# Altium PCB RingEncoder.PcbDoc
Units mil, origin at the board's own origin, x right, y up, seen from the top; angles counter-clockwise.
Board outline 1740 x 1000 mil, 2 copper layers (Top Layer, Bottom Layer); 19 components, 22 nets, 92 pads, 13 vias.
Unrouted connection lines stored in the file: 8.
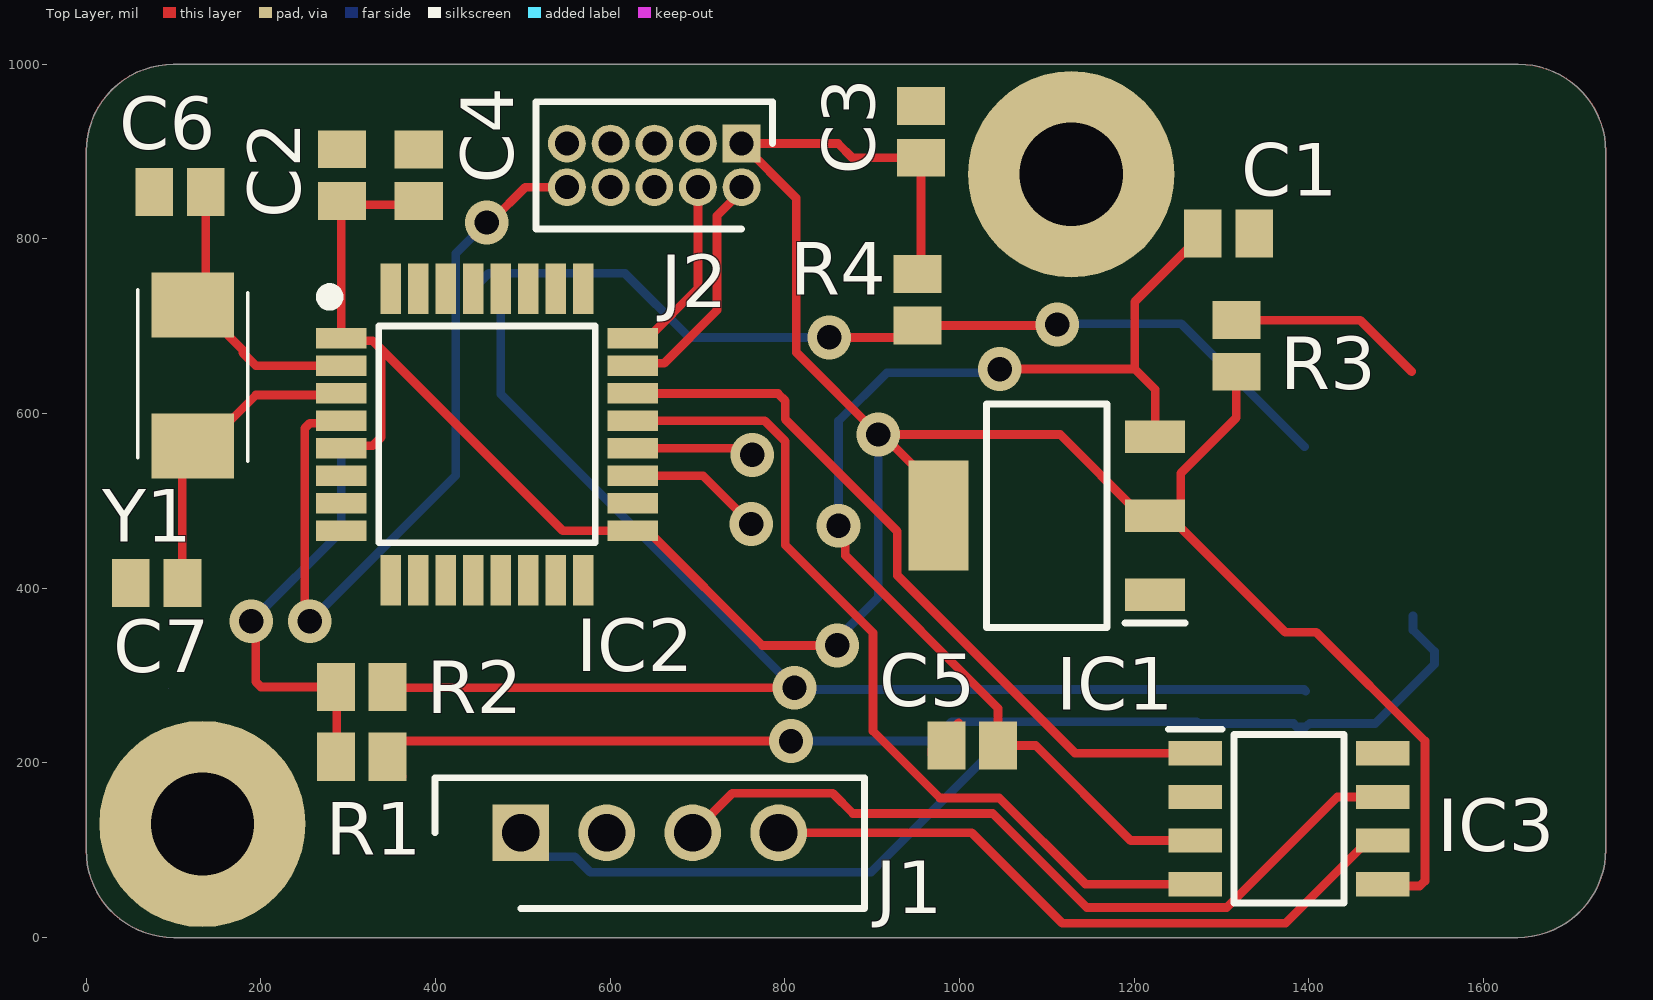
[diagram p0: Top Layer view]
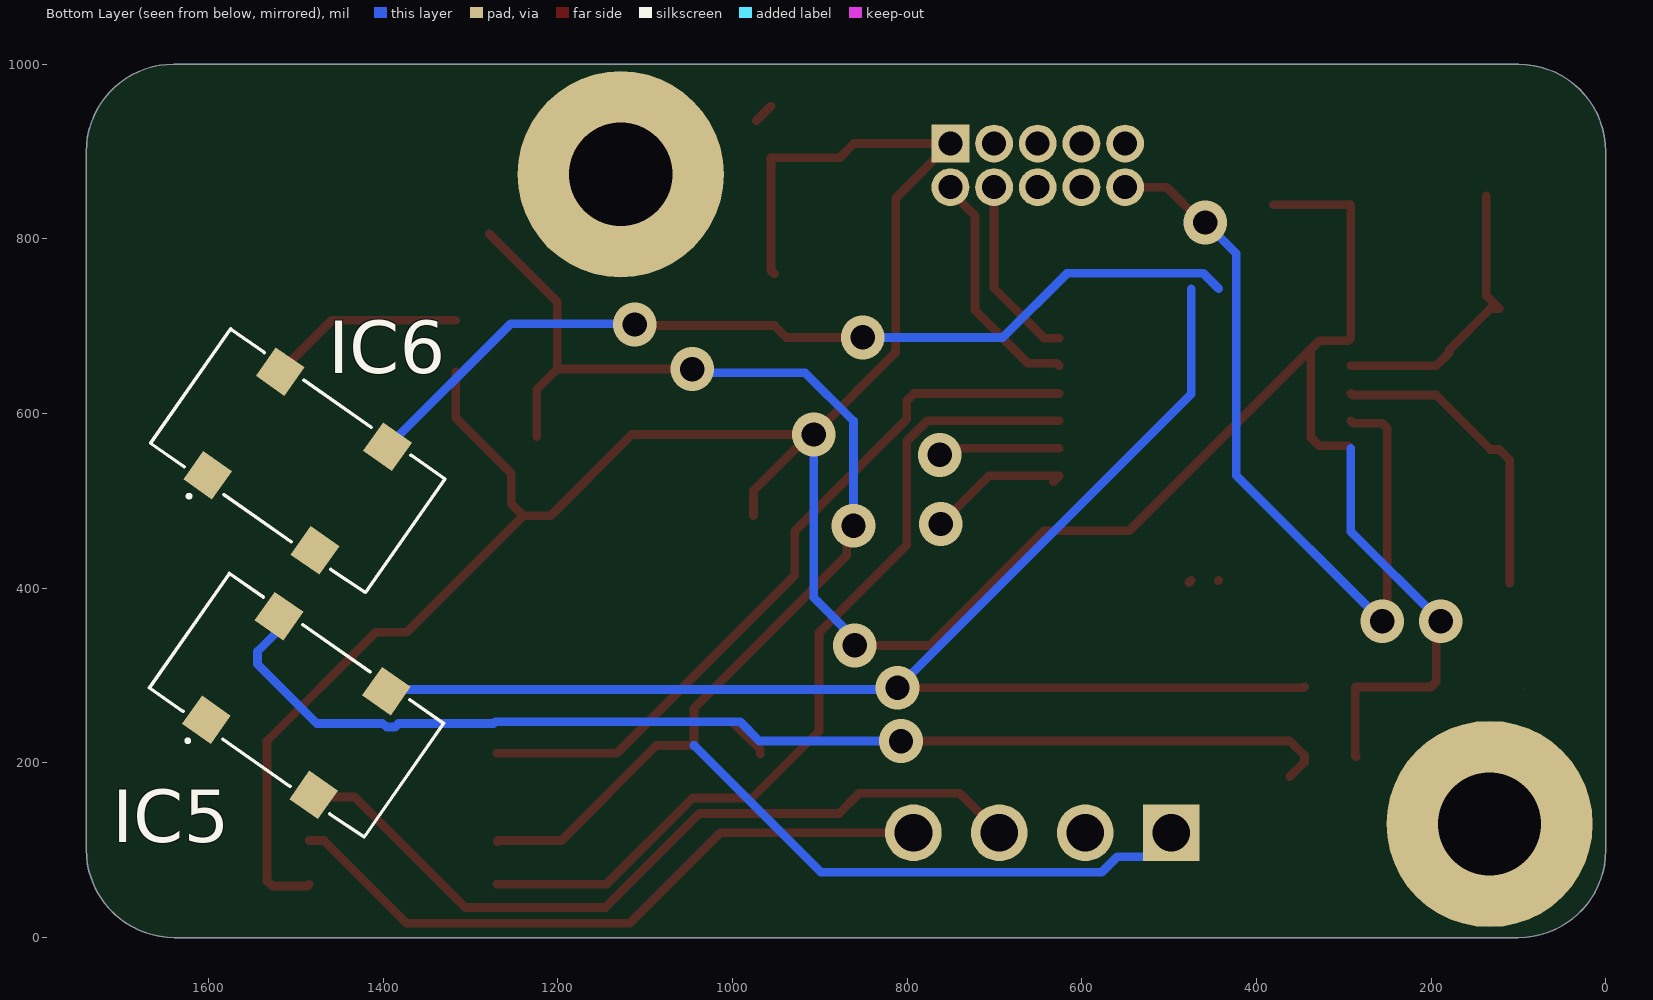
[diagram p1: Bottom Layer view, seen from below]

## Layer stack, top to bottom
Top Solder: solder mask 0.4, Solder Resist, Dk 3.5
Top Layer: signal copper 1.4
Dielectric 1: dielectric 12.6, FR-4, Dk 4.8
Bottom Layer: signal copper 1.4
Bottom Solder: solder mask 0.4, Solder Resist, Dk 3.5

## Board outline
100,0 cw(c100,100) 0,100 0,900 cw(c100,900) 100,1000 1640,1000 cw(c1640,900) 1740,900 1740,101 cw(c1639,101) 1639,0
cut-out: 94.65,285.04

## Design rules (kind name [scope] priority, off if disabled: settings)
Clearance [All] p1: gap=7.87 ignorepadtopadclearanceinfootprint=TRUE except(5.91: Fill-Text Poly-Text Region-Text)
MinimumSolderMaskSliver [All] p1: minsoldermaskwidth=7.72
PolygonConnect [All] p1: connectstyle=Relief reliefconductorwidth=10 reliefentries=4 polygonreliefangle="90 Angle" airgapwidth=10
RoomDefinition RingEncoder [InComponentClass('RingEncoder')] p1 off: confinementstyle=ConfineIn formatcopy=TRUE lockcomponents=FALSE outline 2265.2,-1546.77 2514.17,-1546.77 2265.2,-1546.77
RoutingVias [All] p1: holewidth=28 width=50 viastyle="Through Hole" minholewidth=28 minwidth=50 maxholewidth=28 maxwidth=50
SilkToSolderMaskClearance [IsPad] p1: minsilkscreentomaskgap=5.91 clearancetoexposedcopper=TRUE
SolderMaskExpansion [All] p1: expansion=4 istentingtop=FALSE
Width [All] p1: maxlimit=10 minlimit=10 preferedwidth=10
28 further rules are at their usual default settings.

## Components (designator, comment, footprint, x,y, rotation, side; value= is the part's Value field where it differs from the comment)
C1 "Cap2" C0805 1308,806 r0 top value=10uF
C2 "Cap" C0805 292.91,873.07 r90 top value=10nF
C3 "Cap2" C0805 956,922.53 r90 top value=100uF
C4 "Cap" C0805 380.79,872.83 r90 top value=1uF
C5 "Cap" C0805 1014.53,220 r180 top value=100nF
C6 "Cap" C0805 107.4,853.54 r0 top value=4pF
C7 "Cap" C0805 80.53,406 r0 top value=4pF
IC1 "TLV1117-33IDCYR" SOT230P700X180-4N 1100,483 r180 top
IC2 "STM32F042K4T6" QFP80P900X900X160-32N 458.9,576.06 r0 top
IC3 "TJA1051T_3,118" SOIC127P600X175-8N 1377.28,136 r0 top
IC5 "OPB733TR" OPB733TR 1499.4,265.7 r215 bottom
IC6 "OPB733TR" OPB733TR 1497.99,545.68 r215 bottom
J1 "B4B-EH-A__LF___SN_" SHDR4W64P0X250_1X4_1250X380X600P 497.57,120 r0 top
J2 "GRPB052VWVN-RC" HDRV10W50P127_2X5_635X340X430P 750.47,909.21 r180 top
R1 "Res1" C0805 315.53,207 r0 top value=80
R2 "Res1" C0805 315.53,287 r180 top value=4.7k
R3 "Res1" C0805 1317,677.47 r90 top value=80
R4 "Res1" C0805 952,730.47 r90 top value=4.7k
Y1 "CX5032GB08000H0HPQZ1" CX5032GB08000H0HPQZ1 122.05,643.62 r90 top

## Footprints (in the part's own frame and the unit in brackets; to place one, negate y for a bottom-side part, rotate by r counter-clockwise, add the part's x,y. Pads: shape width x height; smd on the part's side, far side on the other; paste and mask are expansions set on the pad)
C0805 [mm] "Chip Capacitor, Body 2.0x1.3mm, IPC High Density"
  rect 1.1x1.4 smd: 1(-0.75,0) 2(0.75,0)
  body extent -1.1,-0.72 1.1,0.72, height 1.4
CX5032GB08000H0HPQZ1 [mm]
  rect 1.9x2.4 smd: 1(-2.05,0) 2(2.05,0)
  silkscreen extent -2.5,-1.6 2.5,1.6, body extent -2.81,-1.6 2.81,1.6, height 1.2
HDRV10W50P127_2X5_635X340X430P [mm]
  rect 1.1x1.1 hole 0.7: 1(0,0)
  round 1.1 hole 0.7: 2(0,1.27) 3(1.27,0) 4(1.27,1.27) 5(2.54,0) 6(2.54,1.27) 7(3.81,0) 8(3.81,1.27) 9(5.08,0) 10(5.08,1.27)
  silkscreen extent -0.9,-1.21 5.98,2.48, body extent -0.64,-1.06 5.71,2.33, height 4.3
OPB733TR [mm]
  rect 1.02x1.02 smd: 1(-1.905,-1.84) 2(1.905,-1.84) 3(1.905,1.84) 4(-1.905,1.84)
  silkscreen extent -3.8,-2.7 3.81,2.03, body extent -3.81,-2.03 3.81,2.03, height 2.99
QFP80P900X900X160-32N [mm]
  rect 1.475x0.6 smd: 1(-4.238,2.8) 2(-4.238,2) 3(-4.238,1.2) 4(-4.238,0.4) 5(-4.238,-0.4) 6(-4.238,-1.2) 7(-4.238,-2) 8(-4.238,-2.8) 17(4.238,-2.8) 18(4.238,-2) 19(4.238,-1.2) 20(4.238,-0.4) 21(4.238,0.4) 22(4.238,1.2) 23(4.238,2) 24(4.238,2.8)
  rect 0.6x1.475 smd: 9(-2.8,-4.238) 10(-2,-4.238) 11(-1.2,-4.238) 12(-0.4,-4.238) 13(0.4,-4.238) 14(1.2,-4.238) 15(2,-4.238) 16(2.8,-4.238) 25(2.8,4.238) 26(2,4.238) 27(1.2,4.238) 28(0.4,4.238) 29(-0.4,4.238) 30(-1.2,4.238) 31(-2,4.238) 32(-2.8,4.238)
  silkscreen extent -4.77,-3.15 3.15,4.2, body extent -4.5,-4.5 4.5,4.5, height 1.6
SHDR4W64P0X250_1X4_1250X380X600P [mm]
  rect 1.65x1.65 hole 1.1: 1(0,0)
  round 1.65 hole 1.1: 2(2.5,0) 3(5,0) 4(7.5,0)
  silkscreen extent -2.5,-2.2 10,1.6, body extent -2.5,-1.9 10,1.9, height 6
SOIC127P600X175-8N [mm]
  rect 1.55x0.7 smd: 1(-2.725,1.905) 2(-2.725,0.635) 3(-2.725,-0.635) 4(-2.725,-1.905) 5(2.725,-1.905) 6(2.725,-0.635) 7(2.725,0.635) 8(2.725,1.905)
  silkscreen extent -3.5,-2.45 1.6,2.61, body extent -3,-2.45 3,2.45, height 1.75
SOT230P700X180-4N [mm]
  rect 1.75x0.95 smd: 1(-3.15,2.3) 2(-3.15,0) 3(-3.15,-2.3)
  rect 1.75x3.2 smd: 4(3.15,0)
  silkscreen extent -4.03,-3.25 1.75,3.25, body extent -3.5,-3.25 3.5,3.25, height 1.8

## Part data
C1 C2 C3 C4 C5 C6 C7: "Capacitor", Publisher="Altium Limited"
  C1 C3: PackageDescription="Capacitor; 2 Leads", PackageReference=CAPR5-4X5, Published=23-Sep-2002
  C2 C4 C5 C6 C7: LatestRevisionDate=17-Jul-2002, LatestRevisionNote="Re-released for DXP Platform.", PackageDescription="Radial Cap, Thru-Hole; 2 Leads; 0.3 in Pin Spacing", PackageReference=RAD-0.3, Published=8-Jun-2000
IC1: library part TLV1117-33CDCYR, "Integrated Circuit", Manufacturer_Name="Texas Instruments", Mouser Part Number=595-TLV1117-33CDCYR, Arrow Part Number=TLV1117-33CDCYR, Arrow Price/Stock=https://www.arrow.com/en/products/tlv1117-33cdcyr/texas-instruments, Datasheet Link=http://www.ti.com/lit/gpn/tlv1117, Height=1.8mm, Manufacturer_Part_Number=TLV1117-33CDCYR, Mouser Price/Stock=https://www.mouser.co.uk/ProductDetail/Texas-Instruments/TLV1117-33CDCYR?qs=p6lVfQR1GSoiRKz8KGIbKg%3D%3D
IC2: "Integrated Circuit", Manufacturer_Name=STMicroelectronics, Mouser Part Number=511-STM32F042K4T6, Arrow Part Number=STM32F042K4T6, Arrow Price/Stock=https://www.arrow.com/en/products/stm32f042k4t6/stmicroelectronics, Datasheet Link=https://www.mouser.com/datasheet/2/389/stm32f042c4-956225.pdf, Height=1.6mm, Manufacturer_Part_Number=STM32F042K4T6, Mouser Price/Stock=https://www.mouser.co.uk/ProductDetail/STMicroelectronics/STM32F042K4T6?qs=ClYTdQWm4hDAfZj5dd9NhA%3D%3D
IC3: "Integrated Circuit", Arrow Part Number=TJA1051T/3,118, Manufacturer_Name=NXP, Mouser Part Number=771-TJA1051T3118, Arrow Price/Stock=https://www.arrow.com/en/products/tja1051t3118/nxp-semiconductors, Datasheet Link=http://www.nxp.com/docs/en/data-sheet/TJA1051.pdf, Height=1.75mm, Manufacturer_Part_Number=TJA1051T/3,118, Mouser Price/Stock=https://www.mouser.co.uk/ProductDetail/NXP-Semiconductors/TJA1051T-3118?qs=O%2F7ihdSJpebv1PFlp05wnQ%3D%3D
IC5 IC6: "Integrated Circuit", Manufacturer_Name="OPTEK TECHNOLOGY", Mouser Part Number=828-OPB733TR, Arrow Part Number=OPB733TR, Arrow Price/Stock=https://www.arrow.com/en/products/opb733tr/optek-technology, Datasheet Link=https://www.ttelectronics.com/TTElectronics/media/ProductFiles/Optoelectronics/Datasheets/OPB733.pdf, Height=2.89mm, Manufacturer_Part_Number=OPB733TR, Mouser Price/Stock=https://www.mouser.co.uk/ProductDetail/Optek-TT-Electronics/OPB733TR?qs=Hy8V1%2FADhVLIiFPCqvrxlg%3D%3D
J1: "Connector", Arrow Part Number="B4B-EH-A (LF) (SN)", Manufacturer_Name="JST (JAPAN SOLDERLESS TERMINALS)", Datasheet Link=http://www.jst-mfg.com/product/pdf/eng/eEH.pdf, Height=6mm, Manufacturer_Part_Number="B4B-EH-A (LF) (SN)"
J2: "Connector", Manufacturer_Name=Sullins, Arrow Part Number=GRPB052VWVN-RC, Datasheet Link=https://media.digikey.com/pdf/Data%20Sheets/Sullins%20PDFs/GRPB_%20_2VWVN-RC%2010954-C.pdf, Height=4.3mm, Manufacturer_Part_Number=GRPB052VWVN-RC
R1 R2 R3 R4: "Resistor", LatestRevisionDate=17-Jul-2002, LatestRevisionNote="Re-released for DXP Platform.", PackageDescription="Axial Device, Thru-Hole; 2 Leads; 0.3 in Pin Spacing", PackageReference=AXIAL-0.3, Published=8-Jun-2000, Publisher="Altium Limited"
Y1: "Crystal or Oscillator", Manufacturer_Name="Kyocera Electronic Components", Mouser Part Number=581-CX532GB8HHPQZ1, Arrow Part Number=CX5032GB08000H0HPQZ1, Datasheet Link=https://media.digikey.com/pdf/Data%20Sheets/AVX%20PDFs/CX5032GB0yyyyyH0HPQZ1_Series_Spec.pdf, Height=1.1mm, Manufacturer_Part_Number=CX5032GB08000H0HPQZ1, Mouser Price/Stock=https://www.mouser.co.uk/ProductDetail/Kyocera-Electronic-Components/CX5032GB08000H0HPQZ1?qs=mFMVSnANsC2SO%252B6cjFFj8w%3D%3D

## Free pads (board coordinates)
  round 236.22 hole 118.11: MOUNT1(1128,874) MOUNT2(133,130)

## Via types
v1: diameter 50, hole 28, Top Layer to Bottom Layer, 13 vias

## Nets (pads, with @x,y where several pads share a name; then routed paths per layer and width w, separated by ;. In a path a pad name is that pad's centre, name@x,y a point inside that pad or via, vN(x,y) a via of type N, cw(c..) or ccw(c..) an arc to the next point about the centre after c; other vN are vias at no path point)
+3.3V: C2.1 C3.1 C4.1 IC1.2 IC1.4 IC2.1 IC2.5 IC2.17 IC3.5 J2.1 R1.1 R2.2 R3.1 R4.2 | length 3900.1
  Top Layer w10: v1(189,362) 194,357 194,292.86 199.86,287 R2.2 286.94,286.06 286.94,207.94 R1.1 ; IC2.5 294.92,563.19 328.05,563.19 337.89,573.04 337.89,673.58 ; C4.1@380.79,839.21 293.15,839.21 292.91,839.45 292.05,838.58 IC2.1 294.92,683.43 328.05,683.43 337.89,673.58 ; v1(859.94,334.44) 774.36,334.44 642.97,465.83 IC2.17 545.64,465.83 337.89,673.58 ; R4.2 956,764 C3.1 877,893 860.79,909.21 J2.1 812.94,846.74 812.94,670.06 v1(907,576) v1@911.53,576 ; IC1.4 975.98,511.54 v1@911.53,576 ; R3.1 1317,595.18 1253.46,531.64 1253.46,496.7 IC1.2@1239.76,483 ; IC3.5 1486.57,59 1527.14,59 1533,64.86 1533,225.06 1408.36,349.71 1373.06,349.71 IC1.2@1239.76,483 ; v1@911.53,576 1115.27,576 1208.27,483 IC1.2 IC1.2@1239.76,483
  Bottom Layer w10: v1(189,362) 292.05,465.05 292.05,560.31 ; v1(859.94,334.44) 859.94,342.31 907,389.38 v1(907,576)
+5V: C1.1 C5.1 IC1.3 IC3.3 J1.1 | length 1981.3
  Top Layer w10: v1(861.39,471.39) 869.04,463.74 869.04,437.57 1044.06,262.56 C5.1 1087,220 1196,111 1268,111 IC3.3@1269,110 ; v1(1046,651) 1200.58,651 ; IC1.3 1224.02,627.57 1200.58,651 ; C1.1 1200.58,728.11 1200.58,651
  Bottom Layer w10: J1.1 525.06,92.52 559.34,92.52 577.21,74.65 898.7,74.65 1044.06,220 ; v1(861.39,471.39) 861.39,591.39 916.87,646.87 1029.87,646.87 1034,651 v1(1046,651)
CANH: IC3.7 J1.3 | length 915.7
  Top Layer w10: J1.3 739.78,165.35 854.65,165.35 878,142 1038.1,142 1145.75,34.35 1305.84,34.35 1432.5,161 IC3.7
CANL: IC3.6 J1.4 | length 773.8
  Top Layer w10: J1.4 1013.96,120 1117.48,16.47 1373.31,16.47 1467.83,111 IC3.6
CANRX: IC2.21 IC3.4 | length 999.5
  Top Layer w10: IC2.21 776.91,591.81 800.41,568.31 800.41,449.59 901,349 901,236.58 977.71,159.87 1045.5,159.87 1144.37,61 IC3.4
CANTX: IC2.22 IC3.1 | length 857
  Top Layer w10: IC2.22 626.06,623 792,623 800.41,614.59 800.41,593.58 928.66,465.33 928.66,414.68 1132.34,211 IC3.1
GND: C1.2 C2.2 C3.2 C4.2 C5.2 C6.1 C7.1 IC1.1 IC2.16 IC2.32 IC3.2 IC3.8 IC5.1 IC5.2 IC6.1 IC6.2 J1.2 J2.3 J2.5 | length 72.2
  Top Layer w10: C3.2 C3.2@972.65,935.4 ; C5.2@968.35,210 968.35,215.35 C5.2@999,246
MISO: IC2.12 | length 0.8
  Top Layer w10: IC2.12 IC2.12@443.7,408.66
MOSI: IC2.13 | length 4.1
  Top Layer w10: IC2.13 IC2.13@477.52,406.34
NetC6_2: C6.2 IC2.2 Y1.2 | length 334.2
  Top Layer w10: C6.2@136.93,849.45 136.93,735.12 122.05,720.24 131.89,720.24 179.3,672.82 179.3,669.81 194.31,654.8 IC2.2
NetC7_2: C7.2 IC2.3 Y1.1 | length 354.5
  Top Layer w10: C7.2 110.06,546.83 122.05,558.82 131.89,558.82 194.31,621.24 289.98,621.24 IC2.3
NetIC5_4: IC5.4 R1.2 | length 1342.7
  Top Layer w10: R1.2@361.71,184.44 345.06,201.09 R1.2 345.06,208.35 361.71,225 v1(807,225)
  Bottom Layer w10: v1(807,225) 969.25,225 991.25,247 1271.75,247 1273.75,245 1382.34,245 1386.15,241.19 1395.55,241.19 1400.99,245 1476,245 1543.86,312.86 1543.86,327.53 1519.29,352.1 IC5.4
NetIC6_4: IC6.4 R3.2 | length 225.3
  Top Layer w10: R3.2 1458.91,707 1517.87,648.04
NRESET: IC2.4 J2.10 | length 918.3
  Top Layer w10: v1(256,362) 250.14,367.86 250.14,583.03 256.05,588.94 289.17,588.94 IC2.4 ; v1(458.58,818.77) 460.81,821 464.63,821 502.83,859.21 J2.10
  Bottom Layer w10: v1(256,362) 423.13,529.13 423.13,783.32 v1(458.58,818.77)
NSS: IC2.10
PB5: IC2.28 IC5.3 R2.1 | length 1649.7
  Top Layer w10: R2.1 346.06,286 v1(811,286)
  Bottom Layer w10: 474.65,742.91 474.65,622.35 v1(811,286) 812.99,284.01 1394.43,284.01 IC5.3
PB6: IC2.29 IC6.3 R4.1 | length 1056
  Top Layer w10: v1(850.82,687.18) 938.24,687.18 R4.1 1044.94,700.94 1110.94,700.94 v1(1112,702)
  Bottom Layer w10: 443.15,742.91 461.02,760.79 616.82,760.79 690.42,687.18 v1(850.82,687.18) ; v1@1110.33,703 1254,703 IC6.3
SCK: IC2.11
SCL: IC2.20 | length 140
  Top Layer w10: IC2.20 744.02,560.31 751.71,552.62 v1(762.54,552.62)
SDA: IC2.19 | length 168.4
  Top Layer w10: IC2.19@632.56,522.01 IC2.19 706.3,528.82 v1(761.57,473.54)
SWCLK: IC2.24 J2.4 | length 214
  Top Layer w10: IC2.24 642.97,686.3 700.47,743.8 J2.4
SWDIO: IC2.23 J2.2 | length 275.5
  Top Layer w10: IC2.23 628.62,657.68 661.75,657.68 722.28,718.21 722.28,826.63 750.47,854.82 J2.2
pads on no net: IC2.6 IC2.7 IC2.8 IC2.9 IC2.14 IC2.15 IC2.18 IC2.25 IC2.26 IC2.27 IC2.30 IC2.31 J2.6 J2.7 J2.8 J2.9

## Polygon pours and split planes (outlines as drawn)
GND on Top Layer "NONET_L01_P004" (solid, shelved, pour order 4): 100,0 cw(c100,100) 0,100 0,900 cw(c100,900) 100,1000 1640,1000 cw(c1640,900) 1740,900 1740,101 cw(c1639,101) 1639,0
GND on Bottom Layer "NONET_L02_P005" (solid, shelved, pour order 5): 100,0 cw(c100,100) 0,100 0,900 cw(c100,900) 100,1000 1640,1000 cw(c1640,900) 1740,900 1740,101 cw(c1639,101) 1639,0

## Silkscreen, mask and mechanical layers (free items; w line width, h text height)
Mechanical 1:
  lines w1: 1480,-0.5 100,-0.5 cw(c100,100) -0.5,100 -0.5,900 cw(c100,900) 100,1000.5 1480,1000.5
Mechanical 13:
  drawing of 184 lines, arcs and shapes, not listed